# EAGLE board logger110 (EAGLE 6.6.0)
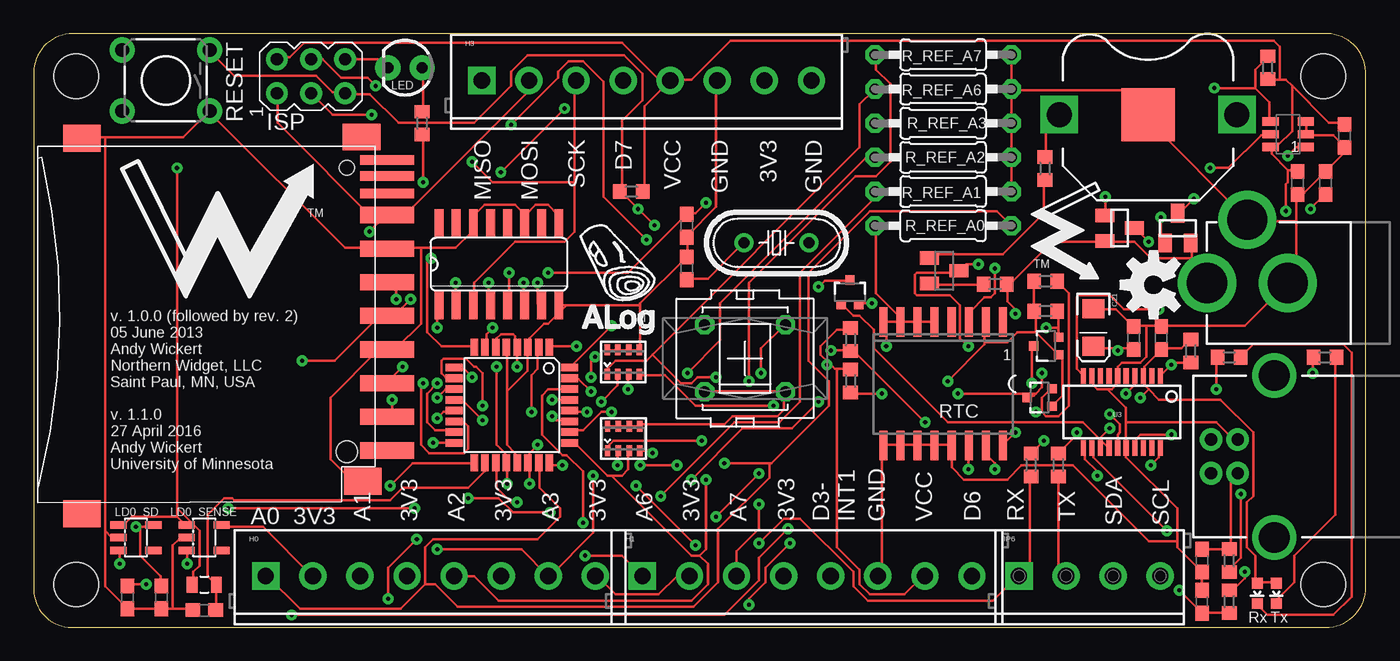
[diagram p0: board, top side]
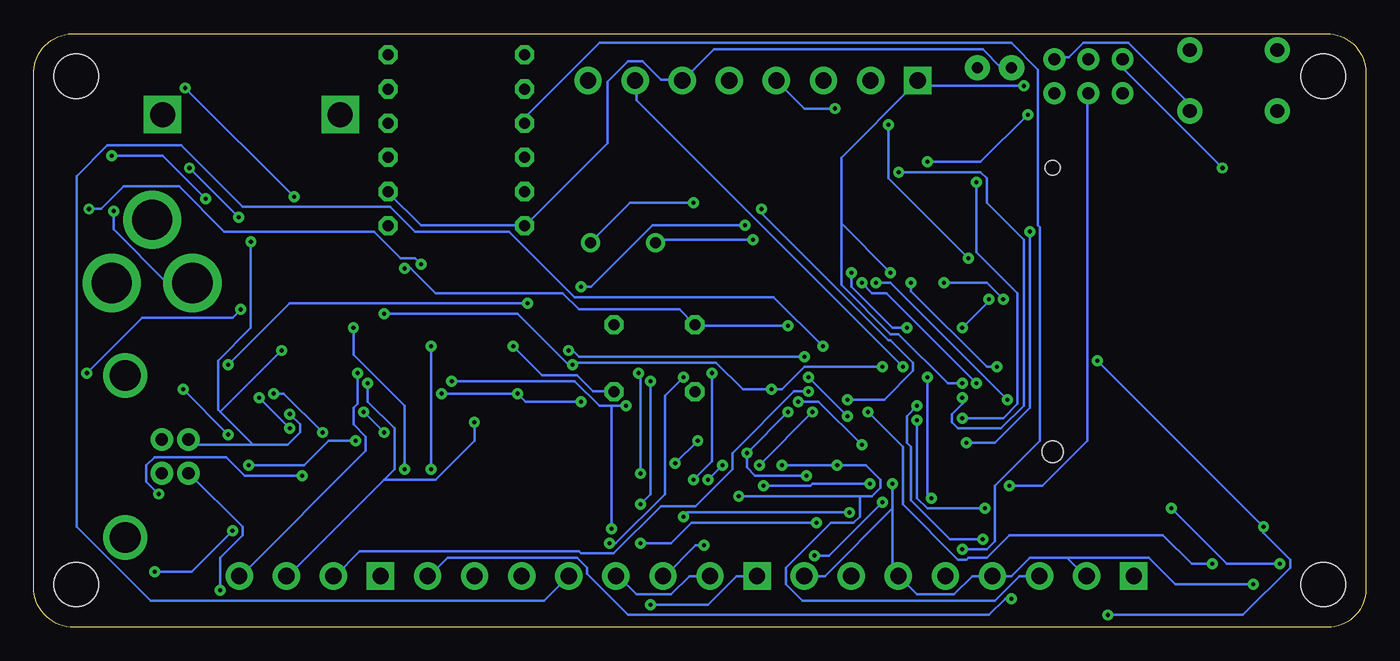
[diagram p1: board, bottom side, seen from below]

Size 99.05 x 44.12 mm. Coordinates in mm from the lower left corner, seen from the top.
Outline: 99.05,41.32 arc90 95.93,44.12 2.91,44.12 arc90 0,41.21 0,2.85 arc90 2.85,0 96.06,0 arc90 99.05,2.98 99.05,41.32
Copper layers (1*16): Top 0.035mm / dielectric 1.5mm / Bottom 0.035mm
Design rules "SparkFun *": minimum track width 8mil, minimum drill 12mil, track to track 8mil, track to pad 8mil, pad to pad 8mil, via to via 8mil, smd to smd 8mil, copper to edge 10mil, drill to drill 8mil, minimum pad ring 12mil, minimum via ring 10mil, stop-mask expansion 4mil, vias tented up to drill 25mil, thermal gap 10mil
Net classes: 0 default: width 0.203 mm, drill 0.305 mm; 1 power: width 0.305 mm, drill 0.508 mm; 2 gnd: width 0.61 mm, drill 0.508 mm, clearance 0.203 mm; 3 usbvcc: width 0.508 mm, drill 0.508 mm, clearance 0.152 mm; 4 aref: width 0.406 mm

## Footprints (pad centres in the part's own frame; a part is rotated, then mirrored left to right if it is on the bottom)
C0603 = smd 1.1 x 1: 1 -0.85,0; 2 0.85,0
CECJ-1206 = smd 0.406 x 0.813: A1 -1.2,-0.9; A2 -1.2,0.9; B1 -0.4,-0.9; B2 -0.4,0.9; C1 0.4,-0.9; C2 0.4,0.9; D1 1.2,-0.9; D2 1.2,0.9
EIA3216 = smd 1.4 x 1.6: A 1.4,0; C -1.4,0
BATTCON_12MM_PTH = smd 3.962 x 3.962: GND 0,0 | drill 1.854 square: VCC@1 -6.604,0; VCC@2 6.604,0
SOT23C = smd 1 x 1.4: 1 -0.95,-1.1; 2 0.95,-1.1; 3 0,1.1
SCREWTERMINAL-3.5MM-8 = drill 1.2 pad 2.032 square: 1 0,0 | drill 1.2 pad 2.032: 2 3.5,0; 3 7,0; 4 10.5,0; 5 14,0; 6 17.5,0; 7 21,0; 8 24.5,0
TSOT23-6 = smd 0.622 x 1.22: 1 -0.95,-1.31; 2 0,-1.31; 3 0.95,-1.31; 4 0.95,1.31; 5 0,1.31; 6 -0.95,1.31
AVRISP = drill 0.9 pad 1.626: 1 -1.27,2.54; 2 1.27,2.54; 3 -1.27,0; 4 1.27,0; 5 -1.27,-2.54; 6 1.27,-2.54
POWER_JACK_PTH = drill 2.997 pad 4.318: GND 0,7.7; GNDBREAK 4.7,10.7; PWR 0,13.7
STAND-OFF = hole 3.302: 0,0
USB-B-PTH = drill 0.914 pad 1.676: D+ 0,1.25; D- 1.981,1.25; GND 0,-1.25; VBUS 1.981,-1.25 | drill 2.286: S1 -2.718,-6.02; S2 -2.718,6.02
SCREWTERMINAL-3.5MM-4 = drill 1.2 pad 2.032 square: 1 0,0 | drill 1.2 pad 2.032: 2 3.5,0; 3 7,0; 4 10.5,0
0805 = smd 0.8 x 1.2: 1 -0.9,0; 2 0.9,0
SOT23-5L = smd 0.55 x 1.2: 1 -0.95,-1.3; 2 0,-1.3; 3 0.95,-1.3; 4 0.95,1.3; 5 -0.95,1.3
LED3MM = drill 0.813 pad 1.88: A -1.27,0; K 1.27,0
LED-0603 = smd 0.8 x 0.8: A 0,-0.75; C 0,0.75
SO16 = smd 0.66 x 2.032: 1 -4.445,-3.073; 2 -3.175,-3.073; 3 -1.905,-3.073; 4 -0.635,-3.073; 5 0.635,-3.073; 6 1.905,-3.073; 7 3.175,-3.073; 8 4.445,-3.073; 9 4.445,3.073; 10 3.175,3.073; 11 1.905,3.073; 12 0.635,3.073; 13 -0.635,3.073; 14 -1.905,3.073; 15 -3.175,3.073; 16 -4.445,3.073
PVA1F = drill 0.813 octagon: 1 -2.997,2.489; 2 -2.997,-2.489; 3 2.997,2.489; 4 2.997,-2.489
TQFP32-08 = smd 1.27 x 0.559: 1 -4.293,2.8; 2 -4.293,2; 3 -4.293,1.2; 4 -4.293,0.4; 5 -4.293,-0.4; 6 -4.293,-1.2; 7 -4.293,-2; 8 -4.293,-2.8; 17 4.293,-2.8; 18 4.293,-2; 19 4.293,-1.2; 20 4.293,-0.4; 21 4.293,0.4; 22 4.293,1.2; 23 4.293,2; 24 4.293,2.8 | smd 0.559 x 1.27: 9 -2.8,-4.293; 10 -2,-4.293; 11 -1.2,-4.293; 12 -0.4,-4.293; 13 0.4,-4.293; 14 1.2,-4.293; 15 2,-4.293; 16 2.8,-4.293; 25 2.8,4.293; 26 2,4.293; 27 1.2,4.293; 28 0.4,4.293; 29 -0.4,4.293; 30 -1.2,4.293; 31 -2,4.293; 32 -2.8,4.293
R0603@1 = smd 1 x 1.1: 1 -0.85,0; 2 0.85,0
SUPER-SOT3 = smd 1 x 1.4: 1 -0.95,-1.1; 2 0.95,-1.1; 3 0,1.1
SOT323 = smd 0.7 x 0.7: 1 -0.65,-0.925; 2 0.65,-0.925; 3 0,0.925
R0603 = smd 1 x 1.1: 1 -0.85,0; 2 0.85,0
0207/10 = drill 0.813 octagon: 1 -5.08,0; 2 5.08,0
TACTILE-PTH = drill 1.016 pad 1.88: 1 -3.251,2.261; 2 3.251,2.261; 3 -3.251,-2.261; 4 3.251,-2.261
SO16W = smd 0.6 x 2.2: 1 -4.445,-4.6; 2 -3.175,-4.6; 3 -1.905,-4.6; 4 -0.635,-4.6; 5 0.635,-4.6; 6 1.905,-4.6; 7 3.175,-4.6; 8 4.445,-4.6; 9 4.445,4.6; 10 3.175,4.6; 11 1.905,4.6; 12 0.635,4.6; 13 -0.635,4.6; 14 -1.905,4.6; 15 -3.175,4.6; 16 -4.445,4.6
06132 = smd 1.2 x 4: 1 6.9,0.9; 2 4.4,0.9; 3 1.9,0.9; 4 -0.6,0.9; 5 -3.1,0.9; 6 -5.6,0.9; 7 -8.1,0.9; 9 9.4,0.9 | smd 0.7 x 4: 8 -9.7,0.9; CD -11,0.9; WP -12.2,0.9 | smd 2 x 2.8: GP -13.8,-21.8; GP2 14.1,-21.8; GP3 11.7,-0.9; GP4 -13.9,-1 | hole 1.1: -11.6,-2.1 | hole 1.6: 9.5,-2.1
SSOP20_L = smd 0.381 x 1.143: 1 -2.857,-2.68; 2 -2.223,-2.68; 3 -1.587,-2.68; 4 -0.953,-2.68; 5 -0.318,-2.68; 6 0.318,-2.68; 7 0.953,-2.68; 8 1.587,-2.68; 9 2.223,-2.68; 10 2.857,-2.68; 11 2.857,2.68; 12 2.223,2.68; 13 1.587,2.68; 14 0.953,2.68; 15 0.318,2.68; 16 -0.318,2.68; 17 -0.953,2.68; 18 -1.587,2.68; 19 -2.223,2.68; 20 -2.857,2.68
HC49U-V = drill 0.813: 1 -2.413,0; 2 2.413,0

## Placement (x,y rotation side)
ADECOUP  0.1uF  [C0603]  12.69,1.27 180 top
C14  10nF  [CECJ-1206]  43.87,14.04 0 top
C15  10nF  [CECJ-1206]  43.84,19.71 0 top
C17  0.1uF  [C0603]  81.79,21.5 90 top
C18  47pF  [C0603]  86.86,4.95 270 top
C19  47pF  [C0603]  86.86,1.91 90 top
C20  0.1uF  [C0603]  83.84,21.5 90 top
C21  10uF  [EIA3216]  78.79,22.28 270 top
C_LDO_SD  2.2uF  [C0603]  9.52,2.22 90 top
C_LDO_SENSE  2.2uF  [C0603]  6.98,2.22 90 top
CLOCK_BATT  3V Backup Battery  [BATTCON_12MM_PTH]  82.86,38.1 0 top
CLOCK_BATT_DECOUP  1uF  [C0603]  96.07,33.02 90 top
COUT  1uF  [C0603]  97.46,36.51 270 top
CX0  33pF  [C0603]  48.57,29.84 90 top
CX1  33pF  [C0603]  48.57,26.67 270 top
D1  BAT54C  [SOT23C]  67.69,26.5 270 top
DECOUP  2.2uF  [C0603]  93.97,33.02 270 top
H0  [SCREWTERMINAL-3.5MM-8]  17.26,3.81 0 top
H1  [SCREWTERMINAL-3.5MM-8]  45.26,3.81 0 top
H3  [SCREWTERMINAL-3.5MM-8]  33.33,40.64 0 top
IC1  LTC4412  [TSOT23-6]  93.27,36.64 90 top
ISP  AVRISP-6  [AVRISP]  20.63,40.96 90 top
J1  POWER_JACKPTH  [POWER_JACK_PTH]  100.94,25.59 90 top
JP1  STAND-OFF  [STAND-OFF]  3.17,3.17 0 top
JP2  STAND-OFF  [STAND-OFF]  95.88,40.96 90 top
JP3  STAND-OFF  [STAND-OFF]  95.88,3.17 90 top
JP4  STAND-OFF  [STAND-OFF]  3.17,40.96 0 top
JP5  USB-B  [USB-B-PTH]  89.52,12.7 180 top
JP6  [SCREWTERMINAL-3.5MM-4]  73.26,3.81 0 top
L_LPF  10uH  [0805]  12.69,3.17 0 top
LD0_SD  LP2985  [SOT23-5L]  7.61,6.67 270 top
LD0_SENSE  LP2985  [SOT23-5L]  12.69,6.67 270 top
LED  [LED3MM]  27.61,41.59 180 top
LED1  Yellow  [LED-0603]  90.97,2.52 180 top
LED2  Blue  [LED-0603]  92.39,2.52 180 top
LOGO1  OSHW-LOGOM  [OSHW-LOGO-M]  83.26,25.45 90 top
LSHIFT  4050D  [SO16]  34.6,26.99 0 top
MANUAL_LOG  Log Now  [PVA1F]  52.89,19.98 0 top
MCU  ATMega328  [TQFP32-08]  35.55,16.51 270 top
PU1  3k  [R0603@1]  60.73,21.39 90 top
PU2  3k  [R0603@1]  60.73,18.31 90 top
PU3  3k  [R0603@1]  75.24,23.5 180 top
PU4  3k  [R0603@1]  75.24,25.72 180 top
Q1  FDN360P  [SUPER-SOT3]  85.07,29.66 0 top
Q2  FDN360P  [SUPER-SOT3]  80.74,29.67 270 top
Q3  2N7002PW  [SOT323]  75.27,20.91 90 top
Q4  2N7002PW  [SOT323]  74.8,17.08 90 top
Q5  2N7002PW  [SOT323]  60.69,24.9 0 top
R11  27ohm  [R0603]  88.89,1.91 90 top
R12  27ohm  [R0603]  88.89,4.95 90 top
R13  1k  [R0603]  96,20.07 0 top
R14  1k  [R0603]  88.89,20.07 0 top
R15  10k  [R0603]  86.02,20.54 90 top
R_LED  220  [R0603]  28.88,37.47 90 top
R_REF_A0  [0207/10]  67.62,29.84 0 top
R_REF_A1  [0207/10]  67.62,32.38 180 top
R_REF_A2  [0207/10]  67.62,34.92 180 top
R_REF_A3  [0207/10]  67.62,37.47 180 top
R_REF_A6  [0207/10]  67.62,40.01 180 top
R_REF_A7  [0207/10]  67.62,42.55 180 top
R_RESET  10k  [R0603@1]  44.44,32.38 0 top
RCKL1  220  [R0603@1]  71.49,25.5 0 top
RCLK2  220  [R0603@1]  75.19,34.1 90 top
RESET  Reset  [TACTILE-PTH]  9.83,40.64 180 top
RSTAT  470k  [R0603@1]  91.75,41.59 270 top
RTC  DS3231SN  [SO16W]  67.62,18.1 180 top
RX_SW1  1k  [R0603@1]  74.16,12.06 270 top
SD  SDMMC06132  [06132]  25.39,22.54 270 top
TX_SW1  1k  [R0603@1]  76.19,12.06 270 top
U3  FT231XS  [SSOP20_L]  80.91,16 180 top
U$1  NWLOGO  [NWLOGO]  13.64,29.21 0 top
U$2  ALOG_LOGO_V1_5.5MM  [ALOG_LOGO_V1_SMALL]  43.5,27.02 0 top
U$3  NWLOGO_MED  [NWLOGO_MED]  77.14,29.53 270 top
XTAL  8MHz  [HC49U-V]  55.23,28.57 0 top

## Library data of the parts
ADECOUP C17-C20 C_LDO_SD C_LDO_SENSE CX0 CX1 DECOUP R11-R15 R_LED R_REF_A0 R_REF_A1-R_REF_A3 R_REF_A6 R_REF_A7 = resistor
C14 C15 = rc-master-smd
C21 = SparkFun-Passives
CLOCK_BATT H0 H1 H3 J1 JP1-JP4 L_LPF LED MCU XTAL = SparkFun
CLOCK_BATT_DECOUP COUT PU1-PU4 R_RESET RCKL1 RCLK2 RSTAT RX_SW1 TX_SW1 = rcl
D1 = semicon-smd-ipc
IC1 U$1-U$3 = awickert
ISP LD0_SD LD0_SENSE SD = adafruit
JP5 = SparkFun-Connectors; PROD_ID: CONN-08278
JP6 = SparkFun-Connectors; PROD_ID: Combine 2x8399
LED1 LED2 = SparkFun-LED
LOGO1 = SparkFun-Aesthetics
LSHIFT = 40xx
MANUAL_LOG = switch-misc
Q1 Q2 = transistor-power
Q3-Q5 = SparkFun-DiscreteSemi
RESET = SparkFun-Electromechanical; PROD_ID: SWCH-08441
RTC = comfile
U3 = SparkFun-DigitalIC

## Nets
3.3V: C20.1 LED1.A LED2.A Q5.1 R15.2 U3.3 U3.13 U3.14
+3V3: C_LDO_SENSE.2 H0.2 H0.4 H0.6 H0.8 H1.2 H1.4 H3.7 LD0_SENSE.5 MCU.20
A0: C14.A1 H0.1 MCU.23 R_REF_A0.2
A1: C14.B1 H0.3 MCU.24 R_REF_A1.2
A2: C14.C1 H0.5 MCU.25 R_REF_A2.2
A3: C14.D1 H0.7 MCU.26 R_REF_A3.2
A6: C15.A1 H1.1 MCU.19 R_REF_A6.2
A7: C15.B1 H1.3 MCU.22 R_REF_A7.2
AVCC: ADECOUP.1 L_LPF.2 MCU.18
BAT: CLOCK_BATT_DECOUP.1 D1.3 RTC.14
BATTERY_POWER: IC1.1 Q1.3
CLK: H3.3 ISP.3 LSHIFT.3 MCU.17
CS-SD: LSHIFT.7 MCU.14
D3-INT1: H1.5 MCU.1
D4-SENSE_3V3_SWITCH: LD0_SENSE.3 MCU.2
D5_MANUAL_LOG: MANUAL_LOG.3 MCU.9
D6: H1.8 MCU.10
D7-CS-EXT: H3.4 MCU.11
D8-SD_3V3_SWITCH: LD0_SD.3 MCU.12
D9-LED: MCU.13 R_LED.1
DI: H3.1 ISP.4 LSHIFT.5 MCU.15
DO: H3.2 ISP.1 MCU.16 SD.7
DTR: Q5.2 R15.1 U3.1
GND: ADECOUP.2 C14.A2 C14.B2 C14.C2 C14.D2 C15.A2 C15.B2 C15.C2 C15.D2 C17.2 C18.2 C19.2 C20.2 C21.C C_LDO_SD.1 C_LDO_SENSE.1 CLOCK_BATT.GND CLOCK_BATT_DECOUP.2 COUT.2 CX0.1 CX1.1 DECOUP.2 H1.6 H3.6 IC1.2 IC1.3 ISP.6 J1.GND J1.GNDBREAK JP5.GND LD0_SD.2 LD0_SENSE.2 LED.K LSHIFT.8 LSHIFT.9 LSHIFT.11 LSHIFT.14 MANUAL_LOG.2 MANUAL_LOG.4 MCU.3 MCU.5 MCU.21 R_REF_A0.1 R_REF_A1.1 R_REF_A2.1 R_REF_A3.1 R_REF_A6.1 R_REF_A7.1 RESET.1 RTC.5 RTC.6 RTC.7 RTC.8 RTC.9 RTC.10 RTC.11 RTC.12 RTC.13 SD.3 SD.6 SD.GP SD.GP3 U3.6 U3.9 U3.16
INT0: MANUAL_LOG.1 MCU.32 RTC.3
LED+: LED.A R_LED.2
N$1: D1.1 RCLK2.1
N$2: CLOCK_BATT.VCC@1 RCLK2.2
N$7: IC1.4 Q2.1 RSTAT.1
N$8: IC1.5 Q1.1
N$27: RX_SW1.1 U3.20
N$29: TX_SW1.1 U3.4
N$56: R11.2 U3.12
N$57: R12.1 U3.11
N$58: C18.1 JP5.D+ R12.2
N$59: C19.1 JP5.D- R11.1
N$67: D1.2 RCKL1.1
RESET: ISP.5 MCU.29 Q5.3 R_RESET.1 RESET.3
RX-I: JP6.1 MCU.30 RX_SW1.2
RXLED: R14.1 U3.17
RXLED-: LED1.C R14.2
SCL: JP6.4 MCU.28 PU2.1 Q4.3
SCL_3V3: PU4.1 Q4.2 RTC.16
SD_CLK: LSHIFT.2 SD.5
SD_CS: LSHIFT.6 SD.1
SD_DI: LSHIFT.4 SD.2
SDA: JP6.3 MCU.27 PU1.1 Q3.3
SDA_3V3: PU3.1 Q3.2 RTC.15
TX-O: JP6.2 MCU.31 TX_SW1.2
TXLED: R13.1 U3.10
TXLED-: LED2.C R13.2
VCC: C15.C1 COUT.1 DECOUP.1 H1.7 H3.5 IC1.6 ISP.2 J1.PWR L_LPF.1 LD0_SD.1 LD0_SENSE.1 MCU.4 MCU.6 PU1.2 PU2.2 Q1.2 Q2.2 R_RESET.2 RCKL1.2 RSTAT.2
VDD: C15.D1 C_LDO_SD.2 LD0_SD.5 LSHIFT.1 PU3.2 PU4.2 Q3.1 Q4.1 RTC.2 SD.4
VUSB: C17.1 C21.A JP5.VBUS Q2.3 U3.15
X0: CX0.2 MCU.7 XTAL.2
X1: CX1.2 MCU.8 XTAL.1

## Tracks (layer width: path | path; a pad name or v marks a point on that pad's centre or on a via)
3.3V  (via drill 0.3)
  Top 0.203: LED2.A 92.34,3.35 90.97,3.35 LED1.A 90.82,3.35 90.82,5.33 90.21,5.94 90.21,9.3 90.67,9.75 90.67,14.48 88.23,16.92 83.66,16.92 82.9,17.68 | R15.2 85.94,21.34 85.33,20.73 83.96,20.73 C20.1 83.81,20.57 82.59,19.36 82.59,18.75 U3.3 82.59,18.59 82.59,17.98 82.9,17.68 | 79.39,13.87 79.85,13.41 U3.14 | 79.39,13.87 79.24,14.02 | 79.24,14.02 78.02,15.24 67.96,15.24 62.47,20.73 62.47,22.1 61.41,23.16 60.95,23.16 60.19,23.93 Q5.1 | 79.39,13.87 79.39,13.41 U3.13 | v82.29,17.07 82.9,17.68 | 79.24,14.02 v80,14.78
  Bottom 0.203: v80,14.78 v82.29,17.07
+3V3  (via drill 0.3)
  Top 0.203: v35.19,10.67 35.19,12.19 MCU.20 35.04,12.34 35.04,12.95 34.43,13.56 v34.43,19.36 | H1.2 47.84,3.81 46.47,2.44 43.27,2.44 41.9,3.81 H0.8 | v8.37,3.2 7,3.2 C_LDO_SENSE.2 | LD0_SENSE.5 14.01,7.47 17.06,7.47 20.72,3.81 H0.2
  Bottom 0.203: 22.24,5.18 24.98,5.18 26.35,3.81 H0.4 29.25,3.81 30.62,2.44 33.37,2.44 34.74,3.81 H0.6 34.89,3.81 35.19,4.12 35.19,8.84 | 22.24,5.18 20.87,3.81 H0.2 | H1.2 50.28,3.81 51.65,2.44 54.24,2.44 55.62,3.81 H1.4 | 35.19,8.84 v35.19,10.67 | H0.8 40.22,3.81 35.19,8.84 | v34.43,19.36 54.24,39.17 54.24,40.54 H3.7 | v8.37,3.2 14.16,3.2 16.14,5.18 22.24,5.18
A0  (via drill 0.3)
  Top 0.203: 29.1,3.2 29.1,5.94 29.71,6.55 37.48,6.55 39.16,8.23 39.16,8.84 37.63,10.36 37.63,12.19 MCU.23 | 29.1,3.2 27.27,1.37 19.8,1.37 17.36,3.81 H0.1 | v49.67,13.87 43.12,13.87 42.81,13.56 42.81,13.26 C14.A1 | 54.7,12.19 54.85,12.19 59.12,16.46 59.12,18.29 57.6,19.81 57.6,26.36 62.17,30.94 71.62,30.94 72.68,29.87 R_REF_A0.2 | 54.7,12.19 v51.35,12.19 | 29.1,3.2 29.86,3.2 31.54,1.52 49.06,1.52 50.89,3.35 50.89,7.32 54.7,11.12 54.7,12.19
  Bottom 0.203: v51.35,12.19 v49.67,13.87
A1  (via drill 0.3)
  Top 0.203: v43.42,12.04 43.42,13.11 C14.B1 | v39.31,12.04 38.55,12.04 38.4,12.19 MCU.24 | v46.62,9.75 52.11,15.24 55.46,15.24 56.99,16.76 56.99,26.36 62.47,31.85 62.47,32.31 R_REF_A1.2
  Bottom 0.203: v43.42,12.04 v39.31,12.04 37.18,12.04 36.11,10.97 36.11,10.36 36.72,9.75 37.63,9.75 | 37.63,9.75 v46.62,9.75 | H0.3 25.75,3.81 27.57,1.98 41.9,1.98 43.12,3.2 43.12,4.42 39.77,7.77 38.09,7.77 37.63,8.23 37.63,9.75
A2  (via drill 0.3)
  Top 0.203: 42.97,11.28 42.66,11.28 40.38,13.56 39.92,13.56 MCU.25 | 42.97,11.28 43.73,11.28 44.19,11.73 44.19,13.11 C14.C1 | v48.61,18.9 51.04,21.34 51.04,24.08 61.86,34.9 62.47,34.9 R_REF_A2.2 | v49.98,10.97 49.98,5.79 49.52,5.33 | 49.52,5.33 48.91,5.33 42.97,11.28 | H0.5 32.76,3.81 34.59,1.98 48.91,1.98 50.13,3.2 50.13,4.72 49.52,5.33
  Bottom 0.203: v48.61,18.9 48.61,12.34 v49.98,10.97
A3  (via drill 0.3)
  Top 0.203: v46.02,12.95 45.86,13.11 45.1,13.11 C14.D1 | v42.97,16 42.21,16 40.83,14.63 39.92,14.63 MCU.26 | v30.01,5.79 36.26,5.79 38.24,3.81 H0.7 38.4,3.81 41.59,7.01 v41.59,11.28
  Bottom 0.203: v42.97,16 v46.02,12.95 46.02,11.89 45.41,11.28 v41.59,11.28 | v30.01,5.79 28.18,5.79 27.57,6.4 27.57,10.52 24.22,13.87 24.22,29.72 24.37,29.87 24.37,41.45 26.35,43.43 56.99,43.43 62.47,37.95 62.47,37.49 R_REF_A3.2
A6  (via drill 0.3)
  Top 0.203: v35.96,9.3 35.5,9.3 34.43,10.36 34.43,12.19 MCU.19 | v40.99,5.33 43.73,5.33 H1.1 | 46.02,20.27 61.41,35.66 61.41,38.86 62.47,39.93 R_REF_A6.2 | 46.02,20.27 45.56,19.81 43.27,19.81 42.66,19.2 42.66,18.9 C15.A1 | v53.18,1.68 53.18,2.13 54.4,3.35 54.4,4.42 v56.23,6.25 | v50.74,18.59 49.37,18.59 48.91,18.14 48.15,18.14 46.02,20.27
  Bottom 0.203: v35.96,9.3 39.92,5.33 v40.99,5.33 | H1.1 46.78,3.81 48.91,1.68 v53.18,1.68 | v56.23,6.25 55.77,6.25 52.11,9.91 52.11,17.22 v50.74,18.59
A7  (via drill 0.3)
  Top 0.203: v42.21,16.76 43.42,17.98 43.42,18.75 C15.B1 | v37.48,13.56 36.87,12.95 36.87,12.34 MCU.22 36.87,12.19 v36.87,10.67 | v53.18,18.29 53.18,25.6 61.1,33.53 62.63,33.53 63.69,34.59 63.69,40.39 62.63,41.45 62.63,42.52 R_REF_A7.2 | v53.94,9.14 53.94,7.32 52.26,5.64 H1.3 | v49.22,6.1 v44.8,10.52
  Bottom 0.203: v42.21,16.76 40.68,16.76 v37.48,13.56 | v53.18,18.29 53.18,9.91 v53.94,9.14 | v36.87,10.67 41.14,10.67 41.29,10.52 v44.8,10.52 | v49.22,6.1 49.83,6.1 52.11,3.81 H1.3
AVCC
  Top 0.203: ADECOUP.1 13.55,1.37 13.55,3.05 L_LPF.2 13.55,3.2 12.94,3.81 12.94,8.38 14.16,9.6 14.77,9.6 14.93,9.45 26.51,9.45 27.42,10.36 32.3,10.36 33.52,11.58 33.52,12.19 MCU.18
BAT  (via drill 0.3)
  Top 0.203: v94.93,31.09 96,32.16 CLOCK_BATT_DECOUP.1 | v70.25,26.98 69.33,26.98 68.88,26.52 D1.3 68.72,26.36 65.67,26.36 65.52,26.21 65.52,24.84 65.67,24.69 68.11,24.69 68.88,23.93 68.88,21.49 v69.48,20.88 | v69.48,11.73 69.48,13.41 RTC.14
  Bottom 0.203: v94.93,31.09 94.02,31.09 92.34,32.77 88.23,32.77 84.88,29.41 73.75,29.41 71.77,27.43 70.7,27.43 v70.25,26.98 | v69.48,20.88 v69.48,11.73
BATTERY_POWER  (via drill 0.3)
  Top 0.203: v93.26,35.05 93.87,35.66 94.48,35.66 IC1.1 | v86.25,31.85 85.18,30.79 Q1.3
  Bottom 0.203: v93.26,35.05 89.45,35.05 v86.25,31.85
CLK  (via drill 0.3)
  Top 0.203: 40.22,33.07 40.22,40.54 H3.3 | 40.22,33.07 40.22,29.41 39.46,28.65 35.8,28.65 32.76,25.6 32.76,23.93 LSHIFT.3 | v26.51,10.52 28.18,12.19 32.6,12.19 MCU.17 | 40.22,33.07 34.13,33.07 v32.6,34.59 | v25.14,38.1 22.24,38.1 20.72,39.62 ISP.3
  Bottom 0.203: v26.51,10.52 24.07,10.52 20.72,13.87 20.72,39.62 ISP.3 | v32.6,34.59 28.64,34.59 v25.14,38.1
CS-SD  (via drill 0.3)
  Top 0.203: v28.95,18.14 28.79,17.98 28.79,13.56 29.4,12.95 31.99,12.95 32.3,13.26 32.3,14.94 31.99,15.24 31.38,15.24 MCU.14 | v37.48,25.6 37.48,24.08 37.63,23.93 LSHIFT.7
  Bottom 0.203: v28.95,18.14 35.65,24.84 36.72,24.84 v37.48,25.6
D3-INT1  (via drill 0.3)
  Top 0.203: v40.38,20.88 38.4,20.88 MCU.1
  Bottom 0.203: v40.38,20.88 44.03,24.54 58.82,24.54 63.69,29.41 70.7,29.41 72.53,31.24 83.5,31.24 88.08,35.81 93.56,35.81 95.85,33.53 95.85,7.47 90.36,1.98 61.1,1.98 59.27,3.81 H1.5
D4-SENSE_3V3_SWITCH  (via drill 0.3)
  Top 0.203: v11.42,4.72 11.42,5.64 LD0_SENSE.3 | v37.02,16 37.02,18.75 37.48,19.2 37.48,20.73 MCU.2
  Bottom 0.203: v11.42,4.72 12.94,4.72 15.08,6.86 26.51,6.86 28.18,5.18 29.56,5.18 29.71,5.03 30.32,5.03 34.43,9.14 34.43,13.41 v37.02,16
D5_MANUAL_LOG  (via drill 0.3)
  Top 0.203: v32.6,18.59 31.99,19.2 31.38,19.2 MCU.9 | v32.3,9.6 34.59,9.6 35.65,8.53 v38.4,8.53 | v53.94,11.43 v50.74,8.23 | v54.09,18.9 54.09,20.73 55.77,22.4 MANUAL_LOG.3
  Bottom 0.203: v32.6,18.59 32.6,9.91 v32.3,9.6 | v38.4,8.53 50.43,8.53 v50.74,8.23 | v53.94,11.43 53.94,18.75 v54.09,18.9
D6  (via drill 0.3)
  Top 0.203: v33.37,16.46 33.37,18.9 32.91,19.36 32.76,19.36 32.15,19.96 30.47,19.96 30.32,19.81 30.32,18.9 30.62,18.59 31.23,18.59 MCU.10 | v28.49,6.55 26.35,4.42 v26.35,2.13
  Bottom 0.203: v33.37,16.46 34.13,15.7 34.13,13.72 33.82,13.41 33.82,9.45 30.93,6.55 v28.49,6.55 | v26.35,2.13 26.81,2.13 28.03,0.91 54.85,0.91 57.9,3.96 57.9,4.42 58.66,5.18 68.27,5.18 69.64,3.81 H1.8
D7-CS-EXT  (via drill 0.3)
  Top 0.203: v30.01,17.07 30.62,17.68 31.23,17.68 MCU.11 | v39.46,38.56 v34.74,33.83
  Bottom 0.203: v30.01,17.07 30.01,16.61 30.77,15.85 30.77,15.24 30.32,14.78 27.12,14.78 25.44,16.46 25.44,28.8 28.18,31.55 28.18,33.38 28.64,33.83 v34.74,33.83 | v39.46,38.56 41.75,38.56 43.73,40.54 H3.4
D8-SD_3V3_SWITCH  (via drill 0.3)
  Top 0.203: v6.39,4.72 6.39,5.64 LD0_SD.3 | v28.34,8.84 v14.47,8.84 | v33.37,15.39 31.99,16.76 31.38,16.76 MCU.12
  Bottom 0.203: v6.39,4.72 10.35,4.72 v14.47,8.84 | v28.34,8.84 32.6,8.84 33.37,9.6 v33.37,15.39
D9-LED  (via drill 0.3)
  Top 0.203: v28.95,33.07 28.95,36.58 R_LED.1 | v30.01,15.54 30.47,16 31.23,16 MCU.13
  Bottom 0.203: v28.95,33.07 28.95,27.89 25.9,24.84 25.9,16.61 26.96,15.54 v30.01,15.54
DI  (via drill 0.3)
  Top 0.203: v30.01,18.14 29.25,17.37 29.25,15.24 29.86,14.63 31.23,14.63 MCU.15 | v35.35,26.36 35.35,23.93 LSHIFT.5 | v25.44,40.23 24.83,40.84 22.85,40.84 21.48,42.22 20.72,42.22 ISP.4
  Bottom 0.203: v30.01,18.14 31.08,18.14 34.74,21.79 35.35,21.79 39,25.45 39,30.02 | 39,30.02 39,34.9 33.67,40.23 | 33.67,40.23 33.37,40.54 H3.1 33.67,40.23 | 39,30.02 v35.35,26.36 | 33.67,40.23 v25.44,40.23
DO  (via drill 0.3)
  Top 0.203: v29.71,13.72 31.23,13.72 MCU.16 | 25.59,30.02 26.2,30.63 SD.7 26.35,30.79 27.73,30.79 36.72,39.78 36.72,40.54 H3.2 | 25.59,30.02 v24.98,29.41 | 25.59,30.02 18.13,37.49 18.13,39.62 ISP.1
  Bottom 0.203: v29.71,13.72 27.57,13.72 24.98,16.31 v24.98,29.41
DTR  (via drill 0.3)
  Top 0.203: v62.32,24.08 61.41,24.08 Q5.2 | U3.1 83.81,18.75 v84.57,19.51 84.72,19.66 85.94,19.66 R15.1
  Bottom 0.203: v62.32,24.08 80,24.08 v84.57,19.51
GND  (via drill 0.3)
  Top 0.203: SD.GP3 24.37,10.97 23.61,10.97 22.09,12.5 22.09,17.07 25.59,20.57 26.2,20.57 SD.3 26.35,20.73 26.96,20.73 28.79,22.55 28.79,28.19 | 36.57,30.63 36.57,30.18 LSHIFT.11 36.57,30.63 | 36.57,30.63 37.33,31.39 38.24,31.39 39,30.63 39,30.18 LSHIFT.9 | 28.79,28.19 26.35,28.19 SD.6 26.2,28.19 23.15,28.19 13.1,38.25 RESET.1 12.94,38.25 11.12,36.42 5.32,36.42 | 28.79,28.19 31.38,28.19 32.6,29.41 32.6,30.02 LSHIFT.14 32.76,30.18 32.76,30.63 33.52,31.39 35.8,31.39 36.57,30.63 | ISP.6 23.31,42.22 25.59,42.22 26.2,41.6 LED.K | 5.32,36.42 3.65,36.42 SD.GP | 5.32,7.16 5.78,6.71 6.24,6.71 LD0_SD.2 | 5.32,36.42 5.32,7.16 | 35.19,17.53 35.19,13.56 35.8,12.95 35.8,12.34 MCU.21 | 35.19,17.53 35.19,20.73 MCU.5 | 35.19,17.53 36.72,19.05 36.72,20.73 MCU.3 36.87,20.88 36.87,21.49 37.94,22.55 38.24,22.55 39.61,23.93 | C15.A2 42.66,20.57 43.42,20.57 C15.B2 43.58,20.57 44.19,20.57 C15.C2 44.34,20.57 44.95,20.57 C15.D2 45.1,20.73 45.1,23.93 | 45.1,23.93 45.1,24.08 48.45,27.43 CX1.1 48.61,27.58 48.61,28.96 CX0.1 48.61,29.11 50.74,31.24 50.74,40.54 H3.6 | 45.1,23.93 39.61,23.93 | 39.61,23.93 39.16,23.93 LSHIFT.8 | H1.6 62.78,3.81 63.08,4.12 63.08,13.41 RTC.9 63.24,13.56 64.3,13.56 RTC.10 64.45,13.56 65.67,13.56 RTC.11 65.83,13.56 66.89,13.56 RTC.12 67.05,13.56 68.11,13.56 RTC.13 68.27,13.41 68.27,11.89 69.18,10.97 72.38,10.97 73.45,12.04 77.26,12.04 82.9,6.4 85.03,6.4 | C19.2 C18.2 86.86,4.12 85.03,5.94 85.03,6.4 | 79.85,17.68 80.15,17.68 80.46,17.98 80.46,18.59 U3.6 80.61,18.75 80.61,19.36 80.91,19.66 82.29,19.66 82.74,20.12 82.74,22.4 | 79.85,17.68 79.09,17.68 78.78,17.98 78.78,18.59 U3.9
  Top 0.203: 81.22,15.24 81.22,16.31 79.85,17.68 | 81.22,15.24 81.22,13.41 U3.16 81.22,13.26 81.22,12.65 85.03,8.84 85.03,6.4 | 81.22,15.24 87.92,15.24 89.14,14.02 89.45,14.02 JP5.GND | IC1.3 94.63,37.49 94.63,36.73 IC1.2 94.63,36.58 96.61,36.58 97.37,35.81 COUT.2 97.37,35.66 97.37,35.2 96.15,33.98 CLOCK_BATT_DECOUP.2 96,33.83 94.48,32.31 94.02,32.31 DECOUP.2 93.87,32.16 93.87,30.18 | 82.74,22.4 83.81,22.4 C20.2 83.96,22.4 90.06,22.4 93.11,25.45 J1.GND 93.26,25.6 93.87,26.21 93.87,30.18 | 82.74,22.4 81.83,22.4 C17.2 81.68,22.4 80.46,23.62 78.93,23.62 C21.C | C14.A2 42.81,14.94 43.42,14.94 C14.B2 43.58,14.94 44.19,14.94 C14.C2 44.34,14.94 44.95,14.94 C14.D2 45.1,15.09 51.35,15.09 51.96,15.7 55.31,15.7 55.77,16.15 55.77,17.37 MANUAL_LOG.4 55.77,17.53 49.98,17.53 MANUAL_LOG.2 | 63.39,22.71 64.3,22.71 RTC.7 64.45,22.71 64.76,22.71 | 63.39,22.71 63.24,22.71 RTC.8 63.39,22.71 | RTC.5 66.89,22.71 65.83,22.71 RTC.6 65.67,22.71 64.76,22.71 | 64.76,22.71 62.63,24.84 62.63,29.72 R_REF_A0.1 | R_REF_A6.1 72.68,40.08 72.68,42.52 R_REF_A7.1 | R_REF_A1.1 72.68,32.46 72.68,34.9 R_REF_A2.1 72.68,35.05 72.68,37.34 R_REF_A3.1 72.68,37.49 72.68,39.93 R_REF_A6.1 | R_REF_A6.1 72.84,39.93 80.91,39.93 82.74,38.1 CLOCK_BATT.GND 82.9,38.1 82.9,37.64 90.21,30.33 J1.GNDBREAK 90.36,30.18 93.87,30.18 | 63.39,22.71 v63.39,20.88 | 10.35,1.37 9.59,1.37 C_LDO_SD.1 9.44,1.37 7,1.37 C_LDO_SENSE.1 6.85,1.52 5.32,3.05 5.32,7.16 | 10.35,1.37 11.72,1.37 ADECOUP.2 | 10.35,1.37 10.35,6.1 10.81,6.55 11.27,6.55 LD0_SENSE.2
  Bottom 0.203: ISP.6 23.15,42.37 22.09,42.37 21.02,43.43 17.67,43.43 13.1,38.86 13.1,38.41 RESET.1 | R_REF_A1.1 72.68,32.31 70.25,29.87 62.63,29.87 R_REF_A0.1 62.47,29.87 56.38,35.97 56.38,40.54 54.85,42.06 53.79,42.06 52.42,40.69 50.89,40.69 H3.6 50.74,40.69 48.45,42.98 28.49,42.98 27.12,41.6 26.35,41.6 LED.K | v63.39,20.88 61.26,18.75 58.66,18.75 57.45,17.53 55.92,17.53 MANUAL_LOG.4
INT0  (via drill 0.3)
  Top 0.203: v42.97,22.4 39.92,19.36 MCU.32 | v71.47,26.67 71.47,24.84 71.16,24.54 70.7,24.54 69.64,23.47 69.64,22.71 RTC.3
  Bottom 0.203: v42.97,22.4 49.83,22.4 MANUAL_LOG.1 49.98,22.55 51.04,23.62 58.51,23.62 59.73,24.84 69.18,24.84 71.01,26.67 v71.47,26.67
LED+
  Top 0.203: R_LED.2 28.95,38.41 28.95,41.45 LED.A
N$1
  Top 0.203: RCLK2.1 75.12,33.22 75.12,30.79 72.07,27.74 66.89,27.74 66.74,27.58 D1.1
N$2
  Top 0.203: RCLK2.2 75.28,35.05 75.28,37.19 76.19,38.1 CLOCK_BATT.VCC@1
N$7  (via drill 0.3)
  Top 0.203: 90.82,40.08 90.82,41.45 91.73,42.37 RSTAT.1 | 90.82,40.08 91.89,39.01 91.89,37.64 IC1.4 | v79.69,32 79.69,30.63 Q2.1 | 90.82,40.08 v87.77,40.08
  Bottom 0.203: v87.77,40.08 v79.69,32
N$8  (via drill 0.3)
  Top 0.203: v87.47,34.14 88.84,34.14 91.28,36.58 91.89,36.58 IC1.5 | v83.81,30.48 83.81,28.96 84.11,28.65 Q1.1
  Bottom 0.203: v83.81,30.48 v87.47,34.14
N$27  (via drill 0.3)
  Top 0.203: v75.12,13.87 74.21,12.95 RX_SW1.1 | v83.05,12.04 83.66,12.65 83.66,13.26 U3.20
  Bottom 0.203: v75.12,13.87 77.1,13.87 78.93,12.04 v83.05,12.04
N$29  (via drill 0.3)
  Top 0.203: v77.56,14.48 77.56,14.33 76.19,12.95 TX_SW1.1 | v81.22,17.37 81.83,17.98 81.83,18.59 U3.4
  Bottom 0.203: v77.56,14.48 80.46,17.37 v81.22,17.37
N$56  (via drill 0.3)
  Top 0.203: v90.06,4.12 90.06,3.66 89.3,2.9 88.99,2.9 R11.2 | v84.27,7.16 78.78,12.65 78.78,13.26 U3.12
  Bottom 0.203: v90.06,4.12 87.31,4.12 v84.27,7.16
N$57  (via drill 0.3)
  Top 0.203: v89.75,9.91 89.75,5.18 88.99,4.42 88.99,4.12 R12.1 | v79.09,11.28 79.09,11.58 78.17,12.5 78.17,13.26 U3.11
  Bottom 0.203: v89.75,9.91 90.67,10.82 90.67,12.04 90.06,12.65 84.72,12.65 83.35,11.28 v79.09,11.28
N$58
  Top 0.203: C18.1 88.84,5.79 R12.2 88.99,5.94 88.99,10.97 89.45,11.43 JP5.D+
N$59  (via drill 0.3)
  Top 0.203: C19.1 88.84,1.07 R11.1 | v85.18,2.74 C19.1 | C19.1
  Bottom 0.203: v85.18,2.74 85.18,5.18 83.5,6.86 83.5,7.47 87.47,11.43 JP5.D-
N$67
  Top 0.203: RCKL1.1 70.55,25.45 66.74,25.45 D1.2
RESET  (via drill 0.3)
  Top 0.203: RESET.3 13.1,42.82 14.93,41 21.02,41 22.24,39.78 23.15,39.78 ISP.5 23.31,39.62 24.98,39.62 27.12,37.49 32.76,37.49 35.5,40.23 35.5,41.3 36.72,42.52 43.88,42.52 45.25,41.15 45.25,39.17 43.73,37.64 43.73,32.46 R_RESET.1 43.73,32.31 v44.95,31.09 v46.17,29.87 | v58.36,25.3 58.82,25.76 60.65,25.76 Q5.3 | v38.55,16.92 39.77,16.92 MCU.29
  Bottom 0.203: v58.36,25.3 57.6,25.3 53.02,29.87 v46.17,29.87 | v38.55,16.92 35.8,16.92 33.67,19.05 33.67,19.66 35.35,21.34 35.5,21.34 44.95,30.79 v44.95,31.09
RX-I  (via drill 0.3)
  Top 0.203: RX_SW1.2 74.06,11.12 74.06,4.57 73.29,3.81 JP6.1 73.14,3.81 71.31,1.98 62.02,1.98 60.95,3.05 60.95,4.12 56.99,8.08 55.77,8.08 v53.94,6.25 | v40.83,7.77 40.83,11.58 39.61,12.8 39.31,12.8 37.79,14.33 37.79,17.22 38.24,17.68 39.77,17.68 MCU.30
  Bottom 0.203: v40.83,7.77 50.13,7.77 51.65,6.25 v53.94,6.25
RXLED  (via drill 0.3)
  Top 0.203: v87.92,17.68 87.92,19.96 R14.1 | v84.57,14.33 82.29,14.33 81.98,14.02 81.98,13.41 U3.17
  Bottom 0.203: v84.57,14.33 v87.92,17.68
RXLED-
  Top 0.203: LED1.C 90.97,1.68 91.73,0.91 96.61,0.91 97.98,2.29 97.98,20.42 97.37,21.03 90.67,21.03 89.75,20.12 R14.2
SCL  (via drill 0.3)
  Top 0.203: 74.51,17.37 74.97,17.83 v74.97,18.9 | 74.51,17.37 74.36,17.22 73.9,17.22 Q4.3 | v63.08,17.37 60.8,17.37 PU2.1 | 74.51,17.37 v68.72,17.37 | v41.14,16 39.92,16 MCU.28 | v47.84,12.04 v45.1,12.04 | v48.91,10.97 52.72,14.78 56.38,14.78 v58.36,16.76
  Bottom 0.203: v74.97,18.9 74.97,16.61 75.28,16.31 75.28,15.09 74.36,14.17 74.36,13.11 83.66,3.81 JP6.4 | v68.72,17.37 v63.08,17.37 62.47,16.76 v58.36,16.76 | v45.1,12.04 v41.14,16 | v48.91,10.97 v47.84,12.04
SCL_3V3  (via drill 0.3)
  Top 0.203: 74.97,16 74.97,17.07 75.58,17.68 Q4.2 | 74.97,16 75.28,15.7 76.19,15.7 76.95,16.46 76.95,24.84 76.19,25.6 PU4.1 | v72.99,14.48 72.07,13.56 RTC.16 | 74.97,16 v74.51,16
  Bottom 0.203: v74.51,16 v72.99,14.48
SD_CLK  (via drill 0.3)
  Top 0.203: v31.38,25.6 31.38,23.93 LSHIFT.2 | v26.96,24.38 26.96,24.99 26.35,25.6 SD.5
  Bottom 0.203: v31.38,25.6 28.18,25.6 v26.96,24.38
SD_CS  (via drill 0.3)
  Top 0.203: v36.41,25.6 36.41,23.93 LSHIFT.6 | v26.66,16.92 26.66,16 26.35,15.7 SD.1
  Bottom 0.203: v36.41,25.6 35.35,25.6 v26.66,16.92
SD_DI  (via drill 0.3)
  Top 0.203: v33.82,25.6 33.82,23.93 LSHIFT.4 | v27.42,19.36 26.35,18.29 SD.2
  Bottom 0.203: v33.82,25.6 33.82,24.99 28.18,19.36 v27.42,19.36
SDA  (via drill 0.3)
  Top 0.203: v74.21,18.14 74.21,20.88 Q3.3 | v66.28,15.24 61.1,20.42 60.8,20.42 PU1.1 60.65,20.57 v59.27,20.57 | v38.55,15.7 38.85,15.39 39.77,15.39 MCU.27 | v41.44,18.59 41.44,19.81 v41.75,20.12
  Bottom 0.203: v74.21,18.14 74.21,16.76 72.23,14.78 72.23,11.73 72.99,10.97 | 72.99,10.97 80.15,3.81 JP6.3 | v66.28,15.24 66.28,13.87 69.18,10.97 72.99,10.97 | v41.44,18.59 v38.55,15.7 | v41.75,20.12 58.51,20.12 58.97,20.57 v59.27,20.57
SDA_3V3  (via drill 0.3)
  Top 0.203: 76.19,22.25 76.19,23.47 PU3.1 | 76.19,22.25 76.19,21.64 Q3.2 | v75.28,22.25 76.19,22.25 | v71.47,11.73 71.47,12.19 70.86,12.8 70.86,13.41 RTC.15
  Bottom 0.203: v75.28,22.25 75.28,20.27 71.47,16.46 v71.47,11.73
TX-O  (via drill 0.3)
  Top 0.203: TX_SW1.2 76.19,4.27 76.65,3.81 JP6.2 | v41.44,17.53 40.53,18.44 39.92,18.44 MCU.31
  Bottom 0.203: v41.44,17.53 42.51,17.53 47.08,12.95 47.08,11.73 49.83,8.99 52.42,8.99 55.92,5.49 58.36,5.49 58.51,5.64 74.82,5.64 76.65,3.81 JP6.2
TXLED  (via drill 0.3)
  Top 0.203: v95.09,18.9 95.09,19.96 R13.1 | v83.66,23.62 81.07,23.62 80,24.69 77.71,24.69 77.56,24.54 77.56,19.2 78.02,18.75 U3.10
  Bottom 0.203: v95.09,18.9 90.97,23.01 84.27,23.01 v83.66,23.62
TXLED-
  Top 0.203: LED2.C 92.5,1.83 92.5,2.13 93.72,3.35 93.72,5.33 96.76,8.38 96.76,19.96 R13.2
VCC  (via drill 0.3)
  Top 0.203: 10.66,8.23 7.31,8.23 6.7,7.62 6.39,7.62 LD0_SD.1 | 10.66,8.23 11.27,7.62 LD0_SENSE.1 | 46.93,40.23 47.23,40.54 H3.5 | 46.93,40.23 45.41,38.71 45.41,32.46 R_RESET.2 | 46.93,40.23 43.73,43.43 20.11,43.43 19.04,42.37 18.13,42.37 ISP.2 | 46.93,40.23 H3.5 | v10.66,34.14 10.66,8.84 | 10.66,8.84 10.66,8.23 | 93.26,33.98 93.87,33.98 DECOUP.1 | 93.26,33.98 92.04,35.2 92.04,35.66 IC1.6 92.04,35.81 92.5,35.81 93.56,36.88 93.56,40.23 | 92.65,40.69 93.11,40.69 93.56,40.23 | 92.65,40.69 91.89,40.69 RSTAT.2 | 93.56,40.23 96.31,37.49 97.37,37.49 COUT.1 | 86.1,27.43 86.1,26.67 87.16,25.6 J1.PWR 86.1,27.43 | 86.1,27.43 86.1,28.5 Q1.2 | 86.1,27.43 83.05,27.43 81.83,28.65 79.69,28.65 Q2.2 79.54,28.65 75.73,28.65 72.68,25.6 72.38,25.6 RCKL1.2 72.38,25.45 72.38,24.23 72.99,23.62 v72.99,23.32 | 93.26,33.98 93.26,33.07 93.11,32.92 v93.11,30.94 | v44.19,17.68 44.19,18.75 C15.C1 | v35.96,19.36 35.96,20.73 MCU.4 35.8,20.88 35.8,21.64 35.65,21.79 34.74,21.79 34.43,21.49 34.43,20.88 MCU.6 | 59.73,19.2 59.58,19.2 59.12,19.66 | 59.73,19.2 60.65,19.2 PU2.2 | 59.12,19.66 58.51,20.27 58.51,20.88 59.73,22.1 60.65,22.1 PU1.2 | 59.73,19.2 59.73,5.94 61.41,4.27 61.41,3.2 62.17,2.44 64.76,2.44 66.13,3.81 H1.7 | 59.12,19.66 v58.97,19.51 | 92.65,40.69 92.65,43.13 92.19,43.59 51.81,43.59 48.91,40.69 47.39,40.69 H3.5 | 10.66,8.84 12.33,7.16 12.33,4.57 11.88,4.12 11.88,3.2 L_LPF.1
  Bottom 0.203: v10.66,34.14 17.97,41.45 17.97,42.22 ISP.2 | v93.11,30.94 93.11,29.57 89.14,25.6 87.31,25.6 J1.PWR | v35.96,19.36 41.75,19.36 43.42,17.68 v44.19,17.68 46.32,17.68 48.3,19.66 58.82,19.66 v58.97,19.51 59.27,19.51 63.08,23.32 v72.99,23.32
VDD  (via drill 0.3)
  Top 0.203: PU4.2 74.36,25.6 74.36,23.62 PU3.2 74.51,23.47 74.51,21.95 | Q4.1 75.73,16.46 76.49,17.22 76.49,19.96 76.34,20.12 Q3.1 74.51,21.95 | 7.92,7.47 8.83,7.47 LD0_SD.5 | v30.01,22.25 30.01,23.77 LSHIFT.1 | v28.03,24.38 26.81,23.16 26.35,23.16 SD.4 26.2,23.01 25.59,23.01 22.39,19.81 v19.95,19.81 | 7.92,7.47 7.92,5.33 9.44,3.81 9.44,3.2 C_LDO_SD.2 | 7.92,7.47 v7.61,7.47 | v55.01,16.46 49.22,16.46 46.93,18.75 45.1,18.75 C15.D1 | v67.96,18.29 70.7,21.03 70.7,21.18 | 70.7,21.18 70.7,22.55 RTC.2 | 74.51,21.95 73.14,21.95 72.38,21.18 70.7,21.18 | v19.19,0.91 51.35,0.91 53.94,3.5 53.94,5.18 v56.07,7.32
  Bottom 0.203: v30.01,22.25 28.03,24.23 v28.03,24.38 | v19.95,19.81 v7.61,7.47 7.61,7.01 5.63,5.03 5.63,4.42 9.13,0.91 v19.19,0.91 | 56.07,16.46 56.99,16.46 58.82,18.29 v67.96,18.29 | 56.07,16.46 v55.01,16.46 | 56.07,16.46 v56.07,7.32
VUSB  (via drill 0.3)
  Top 0.203: 80.61,20.73 79.09,20.73 78.93,20.88 C21.A | 80.61,20.73 81.68,20.73 C17.1 | v80,15.85 80.76,15.09 80.76,14.48 80.61,14.33 80.61,13.41 U3.15 | v82.9,28.65 81.98,29.57 Q2.3 | v80.61,20.57 80.61,20.73
  Bottom 0.203: v80,15.85 79.24,15.09 79.24,14.48 80.15,13.56 82.74,13.56 | 82.74,13.56 87.16,13.56 87.47,13.87 JP5.VBUS | v82.9,28.65 82.9,22.25 85.33,19.81 85.33,16.15 85.18,16 | 82.74,13.56 85.18,16 | 85.18,16 v80.61,20.57
X0  (via drill 0.3)
  Top 0.203: v49.98,31.55 49.22,30.79 48.61,30.79 CX0.2 48.45,30.63 44.19,26.36 v38.24,26.36 | v34.13,22.25 33.67,21.79 33.67,20.88 MCU.7
  Bottom 0.203: v49.98,31.55 54.7,31.55 57.6,28.65 XTAL.2 | v34.13,22.25 35.19,22.25 38.24,25.3 v38.24,26.36
X1  (via drill 0.3)
  Top 0.203: CX1.2 48.61,25.91 50.13,25.91 52.72,28.5 XTAL.1 | v29.56,27.43 29.25,27.13 29.25,21.95 30.32,20.88 32.6,20.88 MCU.8 | v35.5,37.34 39,40.84 39,41.3 39.77,42.06 40.83,42.06 42.36,40.54 42.36,32 v45.56,28.8
  Bottom 0.203: v29.56,27.43 35.5,33.38 v35.5,37.34 | v45.56,28.8 52.57,28.8 52.72,28.65 XTAL.1

## Text on the board
tPlace: MISO | MOSI | SCK | D7 | VCC | GND | 3V3 | GND | 1 | TM | TM | TM | 1 | v. 1.0.0 (followed by rev. 2) / 05 June 2013 / Andy Wickert / Northern Widget, LLC / Saint Paul, MN, USA / / v. 1.1.0 / 27 April 2016 / Andy Wickert / University of Minnesota | A0 | 3V3 | A1 | 3V3 | A2 | 3V3 | A3 | 3V3 | A6 | 3V3 | A7 | 3V3 | D3- / INT1 | GND | VCC | D6 | RX | TX | SDA | SCL | Rx | Tx